# Altium PCB SuperCap-NEW_V2.1.2.PcbDoc (part 1 of 2)
Units mm, origin at the board's own origin, x right, y up, seen from the top; angles counter-clockwise.
Board outline 100.01 x 70.01 mm, 4 copper layers (Top Layer, POWER, GND, Bottom Layer), stack 0.603 mm thick; 121 components, 72 nets, 389 pads, 530 vias.
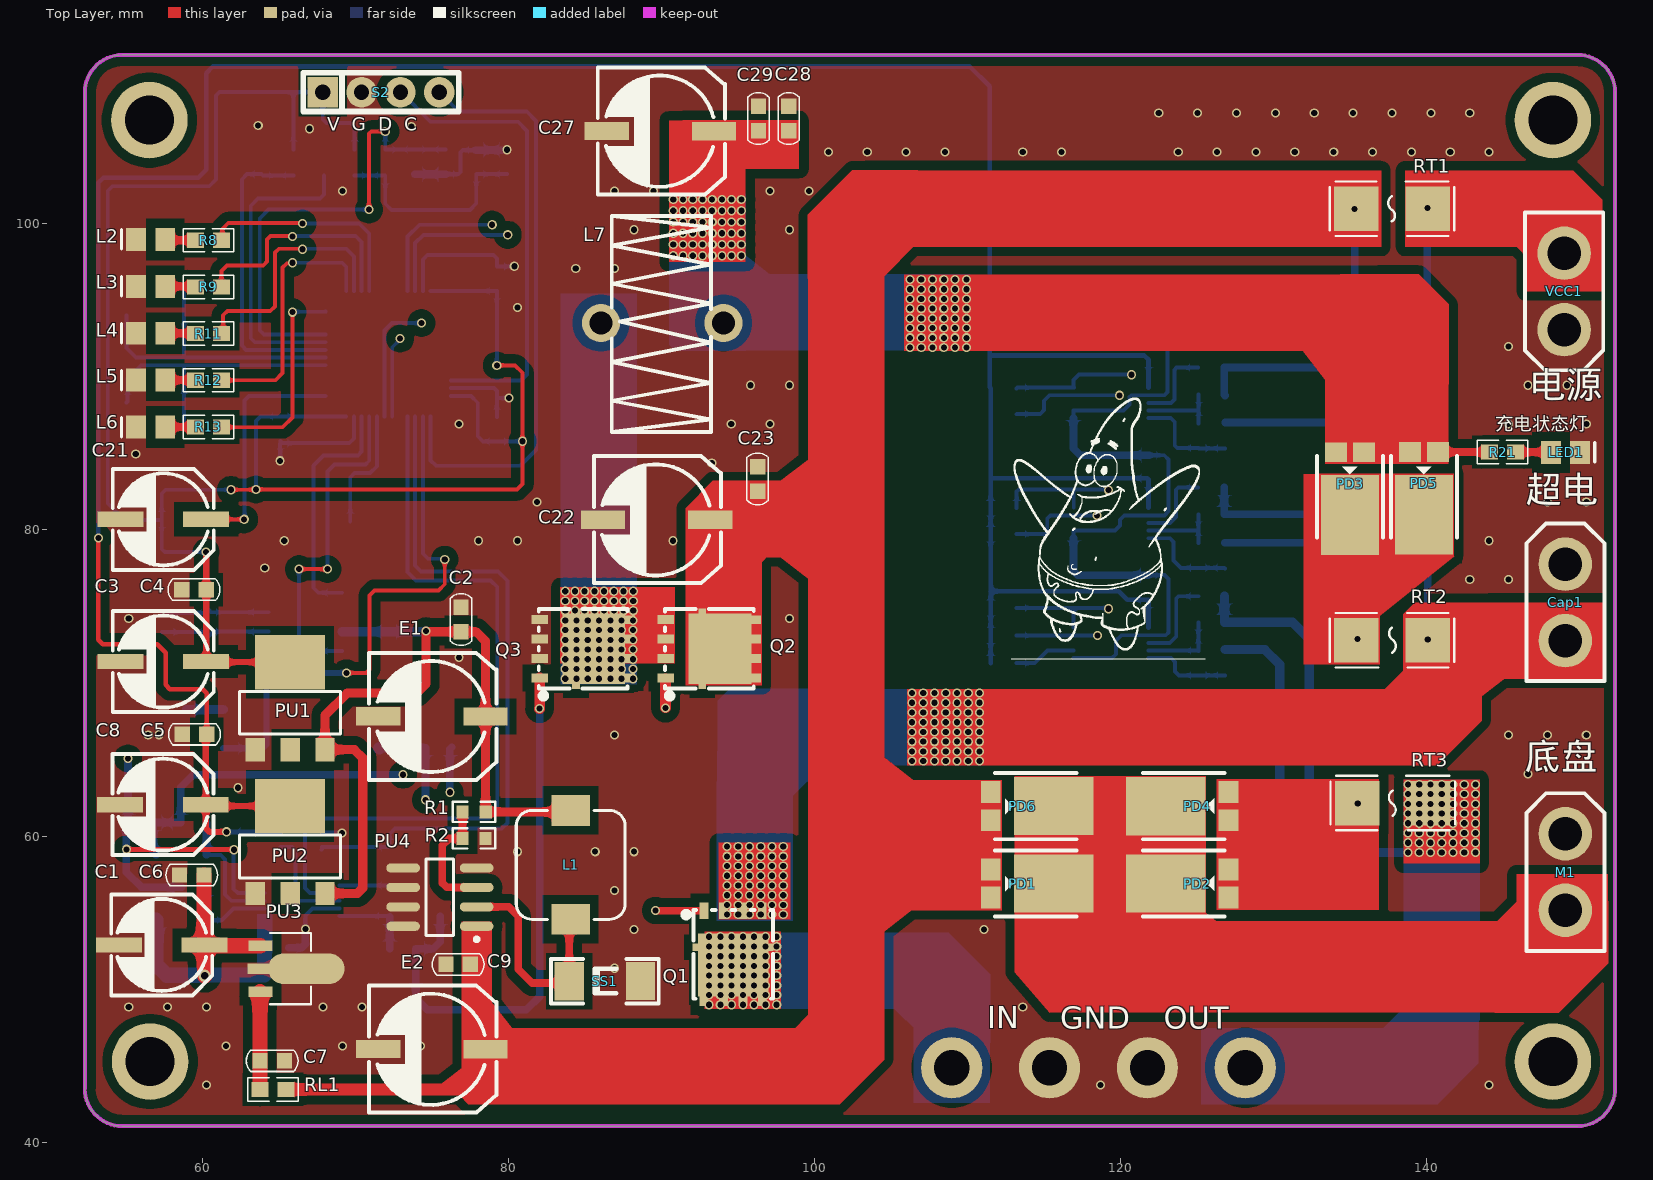
[diagram p0: Top Layer view]
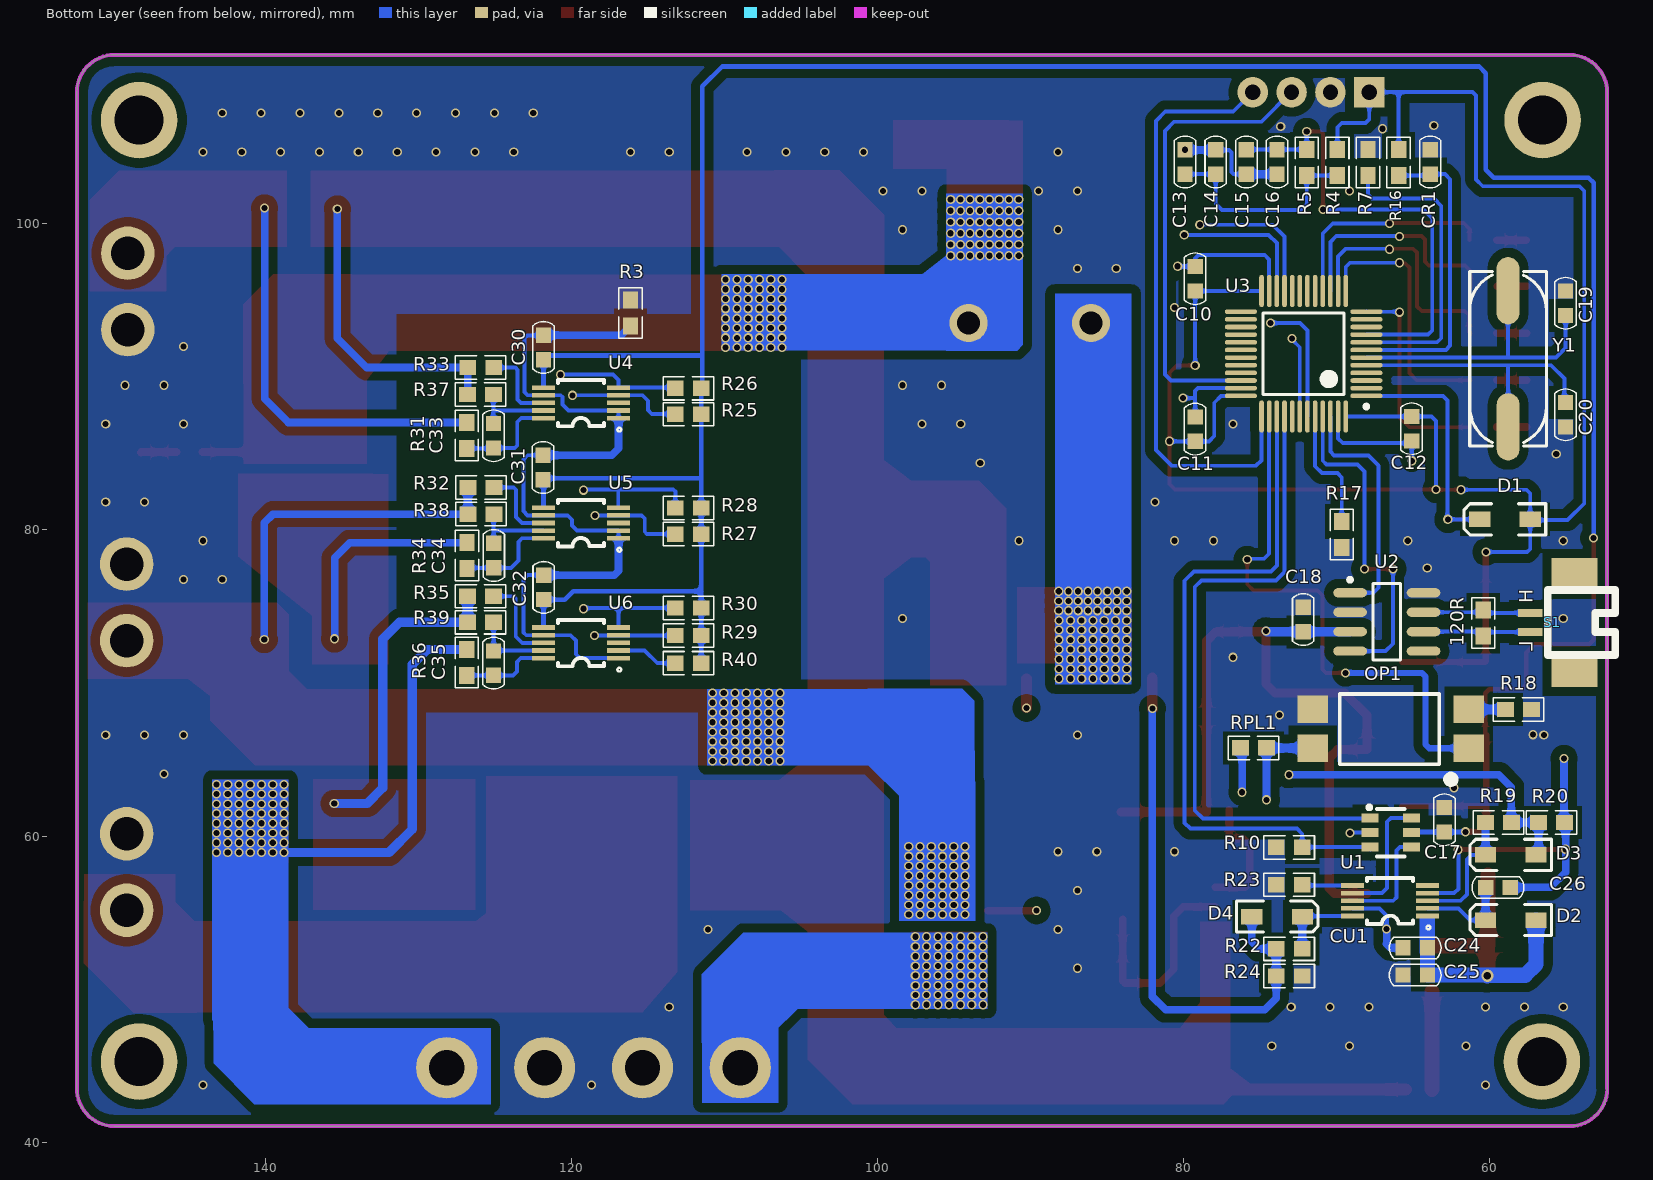
[diagram p1: Bottom Layer view, seen from below]
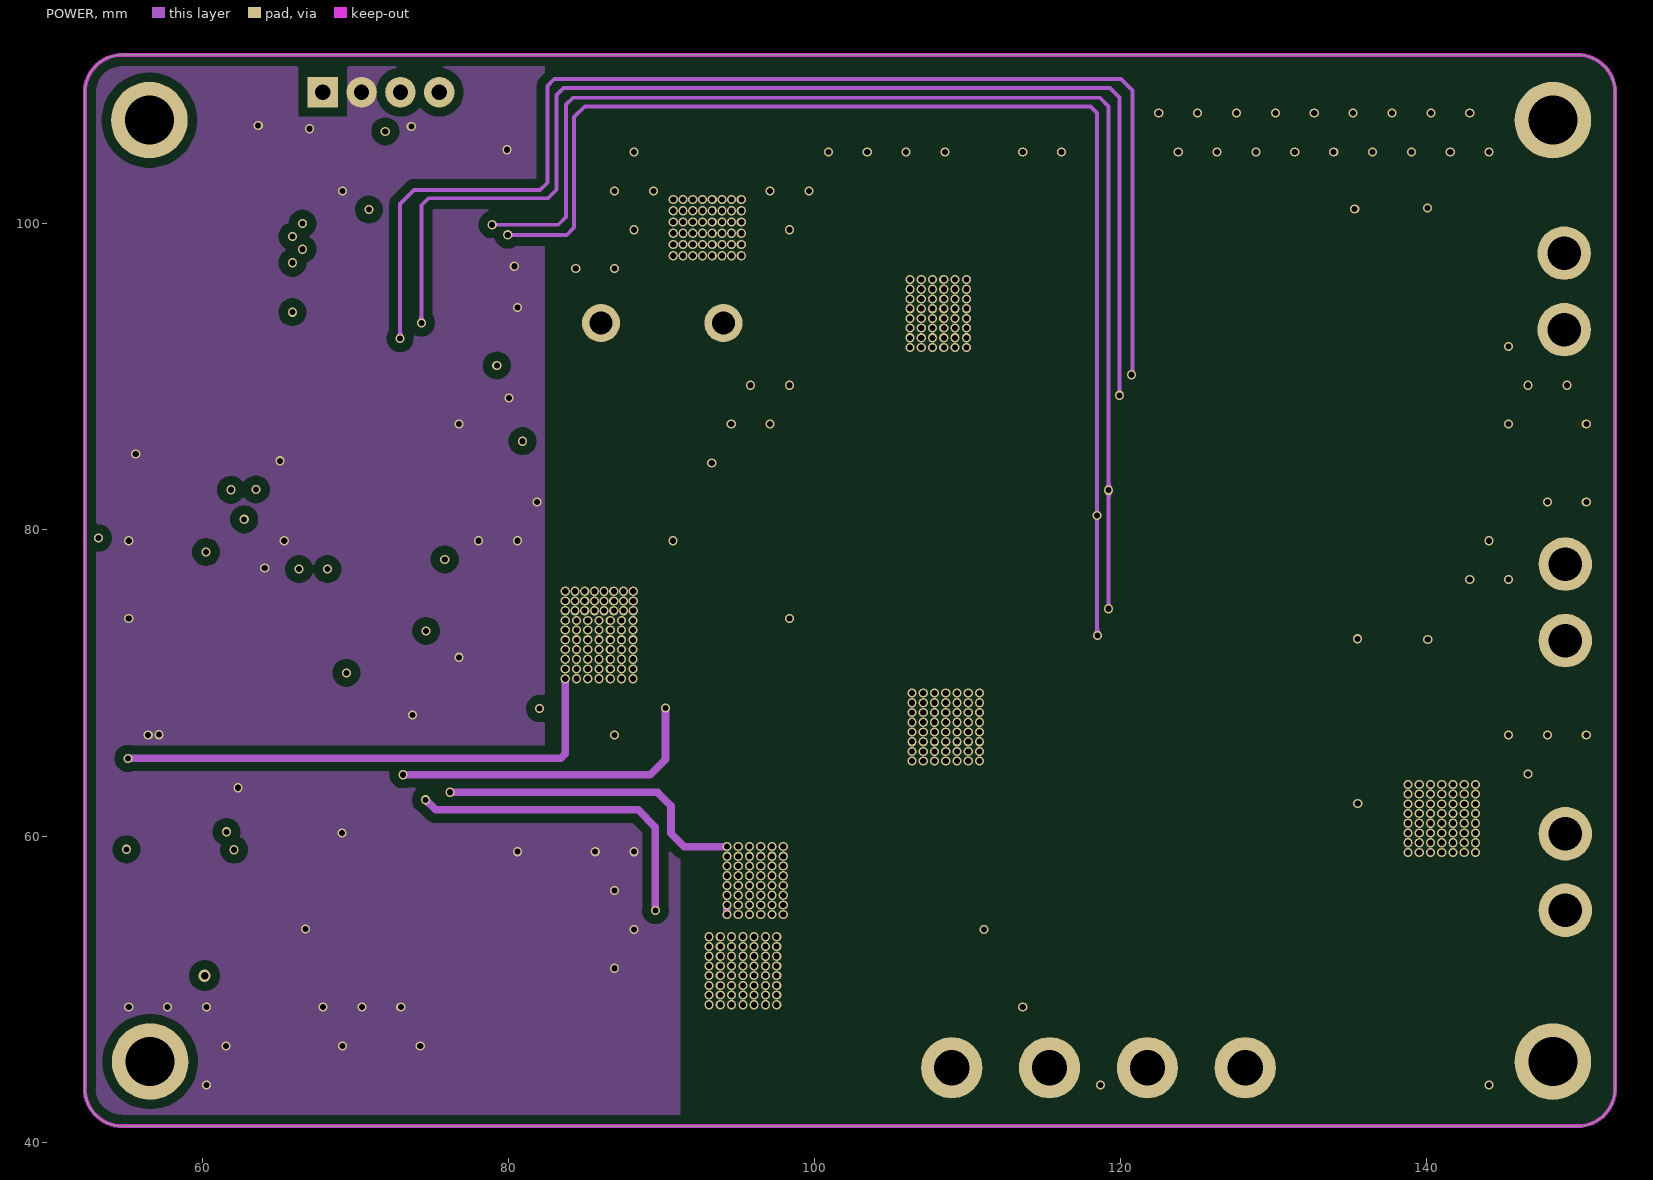
[diagram p2: POWER]
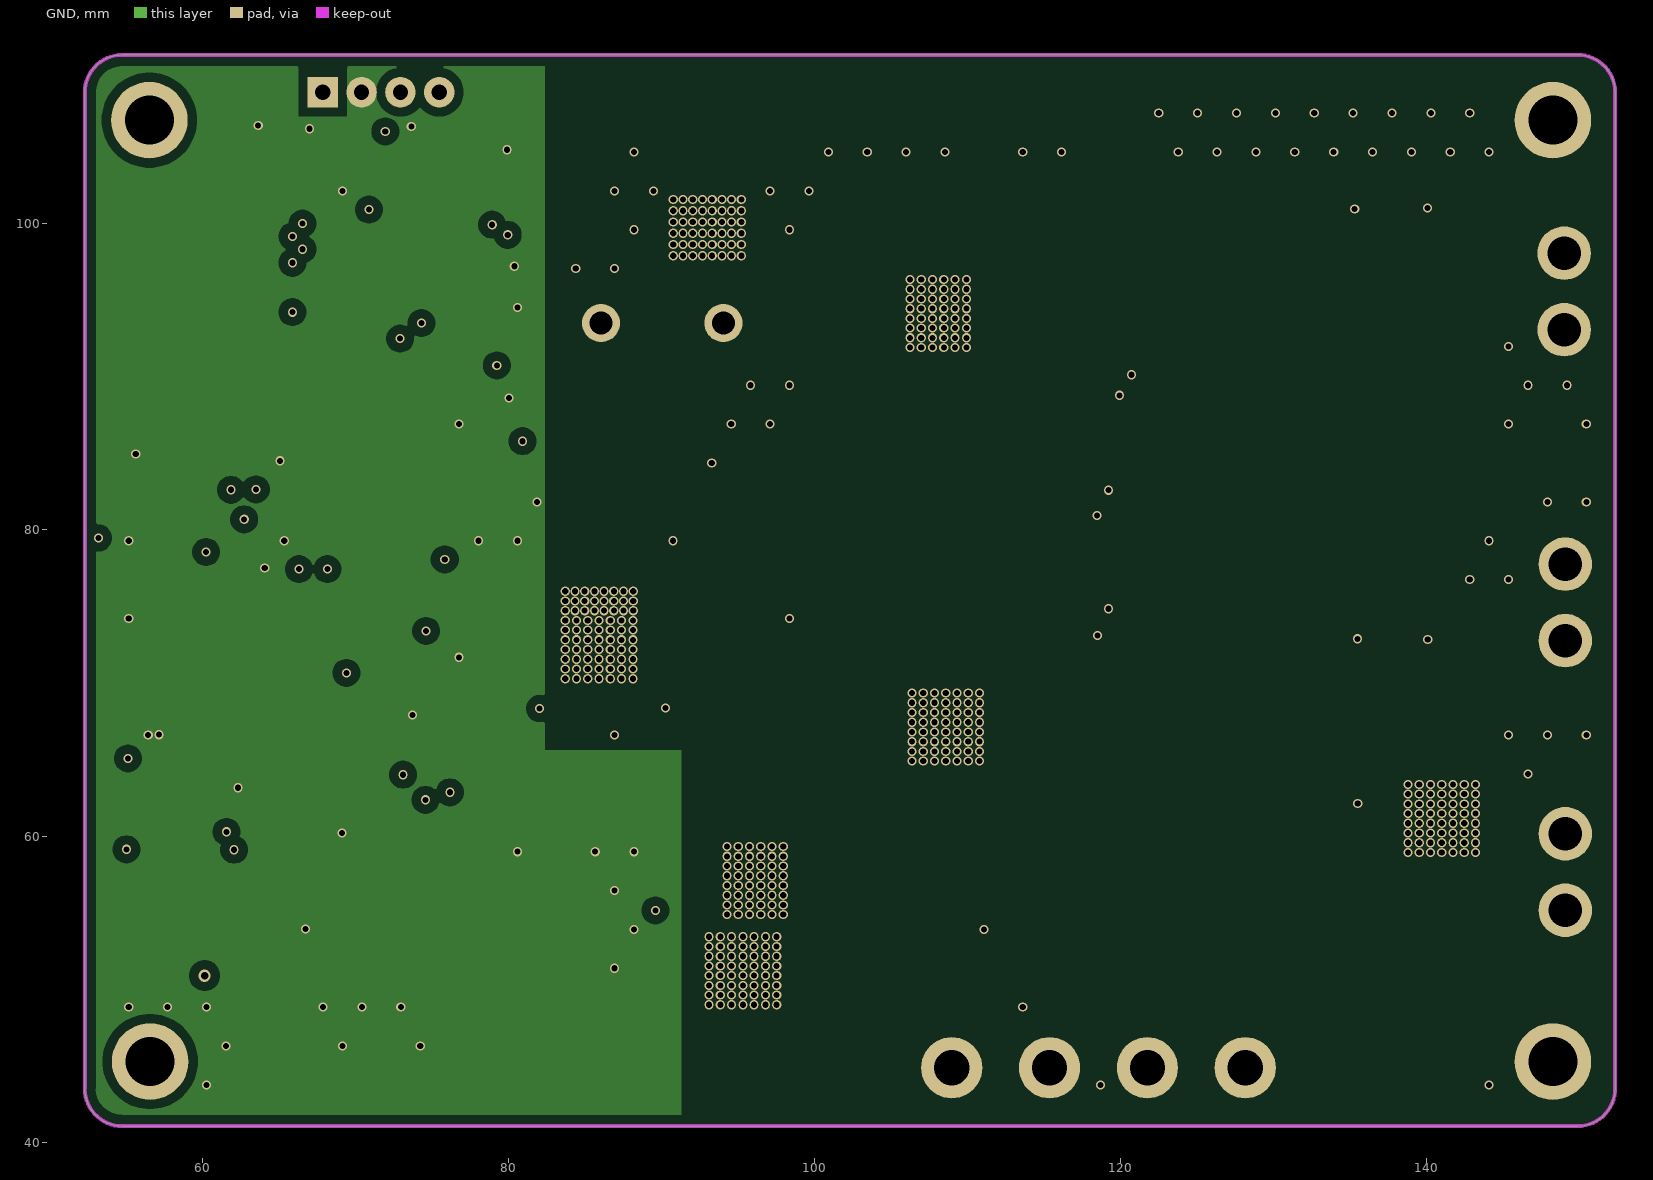
[diagram p3: GND]

## Layer stack, top to bottom
Top Solder: solder mask 0.0102, Solder Resist, Dk 3.5
Top Layer: signal copper 0.0356
Dielectric 2: prepreg 0.0711, PP-006, Dk 4.1
POWER: signal copper 0.035
Dielectric 1: dielectric 0.32, FR-4, Dk 4.8
GND: signal copper 0.035
Dielectric 3: prepreg 0.0711, PP-006, Dk 4.1
Bottom Layer: signal copper 0.0356
Bottom Solder: solder mask 0.0102, Solder Resist, Dk 3.5

## Board outline
52.32,43.483 ccw(c54.771,43.496) 54.784,41.045 54.764,41.045 149.884,41.045 149.886,41.041 ccw(c149.873,43.492) 152.324,43.505 152.324,43.485 152.324,108.636 152.328,108.609 ccw(c149.877,108.596) 149.864,111.047 149.912,111.047 54.812,111.047 54.762,111.049 ccw(c54.775,108.598) 52.324,108.585 52.324,108.56

## Design rules (kind name [scope] priority, off if disabled: settings)
Clearance [All] p1: gap=0.2 ignorepadtopadclearanceinfootprint=FALSE
PolygonConnect [All] p1: connectstyle=Direct reliefconductorwidth=0.254 reliefentries=4 polygonreliefangle="90 Angle" airgapwidth=0.254
RoutingVias [All] p1: holewidth=0.711 width=1.27 viastyle="Through Hole" minholewidth=0.711 minwidth=1.27 maxholewidth=0.711 maxwidth=1.27
SolderMaskExpansion [All] p1: expansion=0.102 istentingtop=FALSE
Width [All] p1: maxlimit=999 minlimit=0.254 preferedwidth=0.254 minimp=50.000000 maximp=50.000000 favimp=50.000000
30 further rules are at their usual default settings.

## Components (designator, comment, footprint, x,y, rotation, side; value= is the part's Value field where it differs from the comment)
120R "Res2" 0603-1 60.427,73.914 r270 bottom value=120R
C1 "47uF/50V" CAP-SMD_BD6.3-L6.6-W6.6-FD 57.353,52.883 r180 top value=100uF
C2 "100nF" 0603C 76.911,74.143 r90 top
C3 "10V/470uF" CAP-SMD_BD6.3-L6.6-W6.6-FD 57.455,71.399 r180 top value=100uF
C4 "100nF" 0603C 59.461,76.098 r0 top
C5 "100nF" 0603C 59.487,66.65 r0 top
C6 "100nF" 0603C 59.309,57.455 r0 top
C7 "104" 0603C 64.567,45.314 r0 top
C8 "Cap Pol1" CAP-SMD_BD6.3-L6.6-W6.6-FD 57.429,62.052 r180 top value=470uF/10V
C9 "104" 0603C 76.721,51.613 r180 top
C10 "100nF" 0603C 79.248,96.418 r270 bottom
C11 "100nF" 0603C 79.248,86.589 r270 bottom
C12 "100nF" 0603C 65.1,86.614 r90 bottom
C13 "1uF" 0603C 79.908,104.051 r90 bottom value=100nF
C14 "100nF" 0603C 77.905,104.051 r270 bottom
C15 "1uF" 0603C 75.902,104.051 r90 bottom value=100nF
C16 "100nF" 0603C 73.9,104.051 r90 bottom
C17 "Cap" 0603C 62.967,61.062 r90 bottom value=100pF
C18 "104" 0603C 72.187,74.143 r90 bottom
C19 "20P" 0603C 55.042,94.818 r90 bottom
C20 "20P" 0603C 55.042,87.528 r270 bottom
C21 "470uF/10V" CAP-SMD_BD6.3-L6.6-W6.6-FD 57.455,80.696 r180 top value=10uF
C22 "47uF/50V" CAP-SMD_BD8.0-L8.3-W8.3-FD 89.687,80.67 r180 top value=100uF
C23 "50V 10uf" 0603C 96.291,83.337 r270 top value=100nF
C24 "25V 10uf" 0603C 64.872,52.691 r180 bottom value=100nF
C25 "100nF" 0603C 64.872,50.913 r180 bottom
C26 "100nF" 0603C 59.461,56.642 r0 bottom
C27 "47uF/50V" CAP-SMD_BD8.0-L8.3-W8.3-FD 89.941,106.07 r180 top value=100uF
C28 "50V 10uf" 0603C 98.323,106.883 r270 top value=100nF
C29 "50V 10uf" 0603C 96.342,106.883 r270 top value=100nF
C30 "100nF" 0603C 121.837,91.933 r270 bottom
C31 "100nF" 0603C 121.862,84.085 r270 bottom
C32 "100nF" 0603C 121.818,76.251 r270 bottom
C33 "100nF" 0603C 125.095,86.157 r270 bottom
C34 "100nF" 0603C 125.081,78.326 r270 bottom
C35 "100nF" 0603C 125.095,71.298 r270 bottom
Cap1 "XT30" XT30 149.073,72.771 r90 top
CR1 "100nF" 0603C 63.887,104.051 r270 bottom
CU1 "LM5106" MSOP_10 64.097,54.754 r90 bottom
D1 "14007" SOD123 57.353,80.696 r0 bottom
D2 "MBR0540TIG" SOD123 56.972,54.508 r0 bottom
D3 "IN4148WS" SOD123 56.972,58.776 r0 bottom
D4 "IN4148WS" SOD123 75.54,54.737 r180 bottom
E1 "Cap Pol1" CAP-SMD_BD8.0-L8.3-W8.3-FD 75.006,67.818 r180 top value=470uF/16V
E2 "Cap Pol1" CAP-SMD_BD8.0-L8.3-W8.3-FD 75.006,46.076 r180 top
L1 "Inductor" "L 6*6" 84.074,54.559 r90 top value=10mH
L2 "红" LED_0805 57.577,98.984 r180 top
L3 "橙" LED_0805 57.577,95.92 r180 top
L4 "绿" LED_0805 57.577,92.856 r180 top
L5 "蓝" LED_0805 57.577,89.792 r180 top
L6 "白" LED_0805 57.577,86.728 r180 top
L7 "68UH" IND-TH_L14.0-W6.5-P8.00-D0.6 86.056,93.523 r0 top
LED1 "绿色" LED_0805 148.138,85.065 r0 top
M1 "XT30" XT30 149.073,55.147 r90 top
OP1 "SuperCap_OUT" SOP-4_L6.5-W4.6-P2.54-LS10.2-TL 66.472,67.005 r0 bottom
PD1 "SB20100" TO-277_3P-L5.4-W4.0-LS6.5-TR 113.585,56.897 r180 top
PD2 "SB20100" TO-277_3P-L5.4-W4.0-LS6.5-TR 125.015,56.895 r0 top
PD3 "SB20100" TO-277_3P-L5.4-W4.0-LS6.5-TR 135.001,83.033 r90 top
PD4 "SB20100" TO-277_3P-L5.4-W4.0-LS6.5-TR 125.015,61.95 r0 top
PD5 "SB20100" TO-277_3P-L5.4-W4.0-LS6.5-TR 139.834,83.038 r90 top
PD6 "SB20100" TO-277_3P-L5.4-W4.0-LS6.5-TR 113.585,61.951 r180 top
PU1 "AMS1117-3.3" SOT-223 65.735,68.504 r90 top
PU2 "AMS1117-3.3" SOT-223 65.735,59.106 r90 top
PU3 "78L05" SOT-89-3_L4.5-W2.5-P1.50-LS4.2-BR 65.151,51.333 r180 top
PU4 "XL1509-ADJ/5V0" "SOP8 N" 75.527,56.007 r180 top
Q1 "HYG210P06LQ1C2" MOS_PQFN 92.786,55.067 r0 top
Q2 "BSC109N10NS3" PDFN-8_L4.9-W5.8-P1.27-LS6.1-BL_2 90.338,70.333 r90 top
Q3 "BSC109N10NS3" PDFN-8_L4.9-W5.8-P1.27-LS6.1-BL_2 82.093,70.333 r90 top
R1 "Res1" R0603 77.064,61.493 r0 top value=3.3K
R2 "Res1" R0603 78.457,59.927 r180 top value=1K
R3 "Res2" 0603-1 116.154,94.183 r90 bottom value=0R
R4 "0R" 0603-1 69.957,104.012 r270 bottom value=1K
R5 "47R" 0603-1 71.959,104.012 r90 bottom value=1K
R7 "0R" 0603-1 67.954,104.012 r90 bottom value=1K
R8 "Res2" 0603-1 60.401,98.933 r180 top value=1K
R9 "Res2" 0603-1 60.401,95.883 r0 top value=1K
R10 "Res2" 0603-1 73.101,59.258 r0 bottom value=10K
R11 "Res2" 0603-1 60.401,92.834 r0 top value=1K
R12 "Res2" 0603-1 60.401,89.784 r0 top value=1K
R13 "Res2" 0603-1 60.401,86.735 r0 top value=1K
R16 "10K" 0603-1 65.952,104.012 r270 bottom
R17 "10K" 0603-1 69.672,79.705 r270 bottom
R18 "1K" 0603-1 58.115,68.275 r180 bottom
R19 "10Ω" 0603-1 59.436,60.884 r180 bottom value=1K
R20 "10K" 0603-1 55.956,60.884 r180 bottom value=1K
R21 "10K" 0603-1 144.971,85.09 r180 top value=1K
R22 "10Ω" 0603-1 73.101,52.629 r0 bottom value=1K
R23 "47K" 0603-1 73.101,56.82 r0 bottom value=1K
R24 "10K" 0603-1 73.101,50.851 r180 bottom value=1K
R25 "4.7K" 0603-1 112.37,87.561 r0 bottom value=1K
R26 "4.7K" 0603-1 112.37,89.256 r0 bottom value=1K
R27 "4.7K" 0603-1 112.37,79.731 r0 bottom value=1K
R28 "4.7K" 0603-1 112.37,81.432 r0 bottom value=1K
R29 "4.7K" 0603-1 112.37,73.101 r0 bottom value=1K
R30 "4.7K" 0603-1 112.37,74.905 r0 bottom value=1K
R31 "5.1Ω" 0603-1 126.848,86.182 r90 bottom value=1K
R32 "Res2" 0603-1 125.927,82.779 r180 bottom value=10R
R33 "Res2" 0603-1 125.937,90.613 r180 bottom value=10R
R34 "5.1Ω" 0603-1 126.826,78.326 r90 bottom value=1K
R35 "Res2" 0603-1 125.945,75.667 r180 bottom value=10R
R36 "5.1Ω" 0603-1 126.848,71.335 r90 bottom value=1K
R37 "5.1Ω" 0603-1 125.959,88.849 r0 bottom value=1K
R38 "5.1Ω" 0603-1 125.927,81.037 r0 bottom value=1K
R39 "5.1Ω" 0603-1 125.945,73.965 r0 bottom value=1K
R40 "Res2" 0603-1 112.37,71.298 r180 bottom value=4.7K
RL1 "47R" 0603-1 64.618,43.434 r180 top value=1K
RPL1 "1K" 0603-1 75.438,65.761 r180 bottom
RT1 "2512 5mΩ 2W" "FUSE-SMD_L6.1-W2.7 - duplicate" 137.744,100.99 r180 top value=1K
RT2 "2512 5mΩ 2W" "FUSE-SMD_L6.1-W2.7 - duplicate" 137.744,72.796 r0 top value=1K
RT3 "2512 5mΩ 2W" "FUSE-SMD_L6.1-W2.7 - duplicate" 137.795,62.154 r180 top value=1K
S1 "CAN通信" 1.25_2Pin 57.353,74.58 r270 bottom
S2 "程序下载" S-4 67.869,108.61 r90 top
SS1 "D Schottky" 贴片M7 86.004,50.419 r270 top
U1 "SN74LVC2G17" SOT-23-6_L2.9-W1.6-P0.95-LS2.8-BR 66.472,60.274 r0 bottom
U2 "TJA1050" "SOP8 N" 66.726,73.99 r180 bottom
U3 "STM32F103C8T6" LQFP-48_M 72.161,91.516 r0 bottom
U4 "INA226" MSOP_10 116.967,87.289 r90 bottom
U5 "INA226" MSOP_10 116.967,79.441 r90 bottom
U6 "INA226" MSOP_10 116.967,71.607 r90 bottom
VCC1 "XT30" XT30 148.996,98.091 r270 top
Y1 "8MHz" X-SM49 58.801,91.186 r90 bottom

## Footprints (in the part's own frame and the unit in brackets; to place one, negate y for a bottom-side part, rotate by r counter-clockwise, add the part's x,y. Pads: shape width x height; smd on the part's side, far side on the other; paste and mask are expansions set on the pad)
1.25_2Pin [mm]
  rect 2.1x3 smd: 0(-2.55,2.9) 0(3.8,2.9)
  rect 0.5x1.6 smd: 1(0,0) 2(1.25,0)
  silkscreen extent -1.5,1.15 2.75,5.55
0603-1 [mm]
  rect 1.1x1 smd: 1(-0.85,0) 2(0.85,0)
  silkscreen extent -1.65,-0.76 1.65,0.76, body extent -1.14,-0.38 1.14,0.38, height 1
0603C [mm]
  rect 1x1 smd: 1(0.8,0) 2(-0.8,0)
  silkscreen extent -1.69,-0.7 1.69,0.7
CAP-SMD_BD6.3-L6.6-W6.6-FD [mm]
  rect 3x1 smd: 1(-2.8,0) 2(2.8,0)
  silkscreen extent -3.3,-3.3 3.3,3.3
CAP-SMD_BD8.0-L8.3-W8.3-FD [mm]
  rect 2.901x1.199 smd: 1(-3.5,0.005) 2(3.5,-0.005)
  silkscreen extent -4.21,-4.16 4.1,4.15
"FUSE-SMD_L6.1-W2.7 - duplicate" [mm]
  rect 2.91x2.905 smd: 1(-2.33,0) 2(2.33,0)
  silkscreen extent -4.06,-1.78 4.06,1.78
IND-TH_L14.0-W6.5-P8.00-D0.6 [mm]
  round 2.5 hole 1.5: 1(0,0) 2(8,0)
  silkscreen extent 0.7,-7.11 7.17,6.98
"L 6*6" [mm]
  rect 2x2.5 smd: 1(0,0) 2(7.112,0)
  silkscreen extent 0,-3.56 7.11,3.56, body extent 0,-3.56 7.11,3.56, height 4
LED_0805 [mm]
  rect 1.3x1.5 smd: 1(0,0) 2(1.9,0)
  silkscreen extent 2.86,-0.63 2.86,0.64
LQFP-48_M [mm]
  oval 2.1x0.3 smd: 1(-4.1,2.75) 2(-4.1,2.25) 3(-4.1,1.75) 4(-4.1,1.25) 5(-4.1,0.75) 6(-4.1,0.25) 7(-4.1,-0.25) 8(-4.1,-0.75) 9(-4.1,-1.25) 10(-4.1,-1.75) 11(-4.1,-2.25) 12(-4.1,-2.75) 25(4.1,-2.75) 26(4.1,-2.25) 27(4.1,-1.75) 28(4.1,-1.25) 29(4.1,-0.75) 30(4.1,-0.25) 31(4.1,0.25) 32(4.1,0.75) 33(4.1,1.25) 34(4.1,1.75) 35(4.1,2.25) 36(4.1,2.75)
  oval 0.3x2.1 smd: 13(-2.75,-4.1) 14(-2.25,-4.1) 15(-1.75,-4.1) 16(-1.25,-4.1) 17(-0.75,-4.1) 18(-0.25,-4.1) 19(0.25,-4.1) 20(0.75,-4.1) 21(1.25,-4.1) 22(1.75,-4.1) 23(2.25,-4.1) 24(2.75,-4.1) 37(2.75,4.1) 38(2.25,4.1) 39(1.75,4.1) 40(1.25,4.1) 41(0.75,4.1) 42(0.25,4.1) 43(-0.25,4.1) 44(-0.75,4.1) 45(-1.25,4.1) 46(-1.75,4.1) 47(-2.25,4.1) 48(-2.75,4.1)
  silkscreen extent -4.22,-2.65 2.65,3.57, body extent -3.5,-3.5 3.5,3.5, height 1.6
MOS_PQFN [mm]
  rect 0.58x1.079 smd: 1(0,0.041) 1(3.81,0.041) 3(1.27,0.041) 3(2.54,0.041)
  rect 0.95x0.5 smd: 2(-0.264,-2.329) 2(4.074,-2.329)
  rect 0.58x1.08 smd: 2(0.005,-5.629) 2(1.275,-5.629) 2(2.545,-5.629) 2(3.805,-5.629)
  rect 4.6x4.1 smd: 2(1.905,-3.489)
  silkscreen extent -1.29,-5.7 4.5,0.1
MSOP_10 [mil]
  rect 12x59.06 smd: 1(0.63,-1.5) 2(20.32,-1.5) 3(40,-1.5) 4(59.69,-1.5) 5(79.37,-1.5) 6(79.37,191.5) 7(59.69,191.5) 8(40,191.5) 9(20.32,191.5) 10(0.63,191.5)
  silkscreen extent -34,-8 99,154
PDFN-8_L4.9-W5.8-P1.27-LS6.1-BL_2 [mm]
  rect 0.58x1.079 smd: 1(3.81,0.041) 3(0,0.041) 3(1.27,0.041) 3(2.54,0.041)
  rect 0.95x0.5 smd: 2(-0.264,-2.329) 2(4.074,-2.329)
  rect 0.58x1.08 smd: 2(0.005,-5.629) 2(1.275,-5.629) 2(2.545,-5.629) 2(3.805,-5.629)
  rect 4.6x4.1 smd: 2(1.905,-3.489)
  silkscreen extent -1.29,-5.7 4.5,0.1
R0603 [mm]
  rect 0.806x0.864 smd: 1(-0.055,0.085) 2(1.452,0.085)
  silkscreen extent -0.69,-0.58 2.08,0.75
S-4 [mm]
  rect 2x2 hole 1: 1(0,0)
  round 2 hole 1: 2(0,-2.54) 3(0,-5.08) 4(0,-7.62)
  silkscreen extent -1.27,-8.89 1.27,1.27
SOD123 [mil]
  rect 55x40 smd: 1(0,0) 2(130,0)
  silkscreen extent -40,-40 170,40
"SOP8 N" [mm]
  oval 2.2x0.6 smd: 1(-2.4,1.905) 2(-2.4,0.635) 3(-2.4,-0.635) 4(-2.4,-1.905) 5(2.4,-1.905) 6(2.4,-0.635) 7(2.4,0.635) 8(2.4,1.905)
  silkscreen extent -2.53,-2.5 0.9,2.88, body extent -1.95,-2.45 1.95,2.45, height 1.75
SOP-4_L6.5-W4.6-P2.54-LS10.2-TL [mm]
  rect 2x1.8 smd: 1(-5.1,1.27) 2(-5.1,-1.27) 3(5.1,-1.27) 4(5.1,1.27)
  silkscreen extent -4.42,-2.29 3.32,3.79
SOT-23-6_L2.9-W1.6-P0.95-LS2.8-BR [mm]
  rect 1.1x0.6 smd: 1(1.35,-0.899) 2(1.35,0.051) 3(1.35,1.001) 4(-1.35,1.001) 5(-1.35,0.051) 6(-1.35,-0.899)
  silkscreen extent -0.9,-1.73 1.52,1.6
SOT-89-3_L4.5-W2.5-P1.50-LS4.2-BR [mm]
  rect 1.575x0.672 smd: 1(1.356,-1.5) 2(1.397,0) 3(1.356,1.5)
  oval 5x2 smd: 2(-1.651,0)
  silkscreen extent -1.95,-2.33 0.7,2.33
SOT-223 [mil]
  rect 60x50 smd: 1(-112.5,90) 3(-112.5,-90) ""(-112.5,0)
  rect 140x180 smd: 2(112.5,0)
  silkscreen extent -73,-130 38,130
TO-277_3P-L5.4-W4.0-LS6.5-TR [mm]
  rect 1.29x1.422 smd: 1(2.054,-0.92) 1(2.054,0.92)
  rect 5.2x3.8 smd: 2(-2.054,0)
  silkscreen extent -3.54,-2.16 1.8,2.16
X-SM49 [mm]
  oval 4.4x1.5 smd: 1(4.45,0.004) 2(-4.45,-0.004)
  silkscreen extent -5.7,-2.5 5.72,2.5
XT30 [mm]
  round 3.5 hole 2.2: 1(0,0) 2(5,0)
  silkscreen extent -2.65,-2.55 7.65,2.55
贴片M7 [mm]
  rect 2.5x1.9 smd: 1(-0.1,2.625) 2(-0.091,-2.025)
  silkscreen extent -1.55,-3.22 1.36,3.82

## Part data
120R R1 R2 R3 R8 R9 R10 R11 R12 R13 R32 R33 R35 R40: "Resistor", LatestRevisionDate=17-Jul-2002, LatestRevisionNote="Re-released for DXP Platform.", Published=8-Jun-2000, Publisher="Altium Limited"
  120R R3 R8 R9 R10 R11 R12 R13 R32 R33 R35 R40: PackageDescription="Axial Device, Thru-Hole; 2 Leads; 0.4 in Pin Spacing", PackageReference=AXIAL-0.4
  R1 R2: PackageDescription="Axial Device, Thru-Hole; 2 Leads; 0.3 in Pin Spacing", PackageReference=AXIAL-0.3
C1 C3 C22 C27: library part "Cap Pol", "极性电解电容", LatestRevisionDate=17-Jul-2002, LatestRevisionNote="Re-released for DXP Platform.", PackageReference=RB7.6-15, Published=8-Jun-2000, Publisher="Altium Limited", Vol=16V
C2 C7 C9: library part C
C4 C5 C6 C10 C11 C12 C13 C14 C15 C16 C23 C24 C25 C26 C28 C29 C30 C31 C32 C33 C34 C35: library part Cap, "无极性电容", LatestRevisionDate=17-Jul-2002, LatestRevisionNote="Re-released for DXP Platform.", PackageReference=RAD-0.3, Published=8-Jun-2000, Publisher="Altium Limited"
C8 E1 E2: "Polarized Capacitor (Radial)", LatestRevisionDate=17-Jul-2002, LatestRevisionNote="Re-released for DXP Platform.", PackageDescription="Polarized Capacitor (Radial); 2 Leads", PackageReference=RB7.6-15, Published=8-Jun-2000, Publisher="Altium Limited"
  E2: H781F=47uF/50V
C17: "Capacitor", LatestRevisionDate=17-Jul-2002, LatestRevisionNote="Re-released for DXP Platform.", PackageDescription="Radial Cap, Thru-Hole; 2 Leads; 0.3 in Pin Spacing", PackageReference=RAD-0.3, Published=8-Jun-2000, Publisher="Altium Limited"
C18 C19 C20 CR1: library part CAP-1
C21: library part "Cap Pol1", "Polarized Capacitor (Radial)", Published=8-Jun-2000, Publisher="Altium Limited", Revision="July-2002: Re-released for DXP Platform."
Cap1 M1 VCC1: library part JP-2
CU1 U4 U5 U6: library part Component_1
D1 D4 PD1 PD2 PD3 PD4 PD5 PD6: library part "Diode 1N914", "High Conductance Fast Diode", Code_JEDEC=DO-204-AH, ComponentLink1Description="Manufacturer Link", ComponentLink1URL=http://www.fairchildsemi.com/, ComponentLink2Description=Datasheet, ComponentLink2URL=http://www.fairchildsemi.com/ds/1N%2F1N4448.pdf, DatasheetVersion=1997, LatestRevisionDate=17-Jul-2002, LatestRevisionNote="Re-released for DXP Platform.", PackageDescription="Diode, Axial; Body 3.8 x 1.9 mm (LxDia. max), Lead Dia. 0.53 mm (max)", PackageReference=DO-35, Published=8-Jun-2000, Publisher="Altium Limited"
D2 D3: library part D-1
L2 L3 L4 L5 L6 LED1: library part LED0, "发光二极管", LatestRevisionDate=08-Jul-2005, LatestRevisionNote="Mech Layer 1 removed.", PackageReference=LED-0, Published=8-Jun-2000, Publisher="Altium Limited"
L7: library part Inductance
OP1: library part Optoisolator1, "4-Pin Phototransistor Optocoupler", DatasheetVersion=Nov-2003, LatestRevisionDate=04-Mar-2005, LatestRevisionNote="Sch pins 3 & 4 Swapped.", PackageReference=DIP-4, Published=24-Mar-1999, Publisher="Altium Limited"
PU1 PU2: library part LD1117
PU4: library part XL1509-ADJ
Q1: library part PMOS-2, "P-Channel Power MOSFET", ComponentLink1Description="Manufacturer Link", ComponentLink1URL=http://www.irf.com/, DatasheetVersion=PD-9.390D, LatestRevisionDate=17-Jul-2002, LatestRevisionNote="Re-released for DXP Platform.", Note="Pin 4 not drawn and electrically connected to Pin 2.", PackageDescription="TO, Thru-Hole, Vertical, Heatsink Mounted; 3 In-Line Leads; Pitch 2.54 mm", PackageReference=TO-220AB, PackageVersion=Feb-1997, Published=8-Jun-2000, Publisher="Altium Limited"
Q2 Q3: library part NMOS-2, "N-Channel Power MOSFET", ComponentLink1Description="Manufacturer Link", ComponentLink1URL=http://www.irf.com/, DatasheetVersion=PD-9.814, LatestRevisionDate=17-Jul-2002, LatestRevisionNote="Re-released for DXP Platform.", Note="Pin 2 is electrically connected to pin 4.", PackageDescription="TO, Thru-Hole, Vertical, Heatsink Mounted; 3 In-Line Leads; Pitch 2.54 mm", PackageReference=TO-220AB, PackageVersion=Feb-1997, Published=8-Jun-2000, Publisher="Altium Limited"
R4 R5 R7 R18 R19 R20 R21 R22 R23 R24 R25 R26 R27 R28 R29 R30 R31 R34 R36 R37 R38 R39 RL1 RPL1 RT1 RT2 RT3: library part Res1, "贴片电阻", LatestRevisionDate=17-Jul-2002, LatestRevisionNote="Re-released for DXP Platform.", PackageReference=AXIAL-0.4, Published=8-Jun-2000, Publisher="Altium Limited"
R16 R17: library part R
S1: library part S-2
S2: library part S-4
SS1: "Schottky Diode", Code_JEDEC=DO-214-AA, LatestRevisionDate=17-Jul-2002, LatestRevisionNote="Re-released for DXP Platform.", PackageDescription="DO-214-AA/SMB; 2 C-Bend Leads; Body 5.3 x 3.6 mm, inc. leads (LxW)", PackageReference=SMB, Published=8-Jun-2000, Publisher="Altium Limited"
U2: library part 24C02
Y1: library part XTAL, "Crystal Oscillator", LatestRevisionDate=17-Jul-2002, LatestRevisionNote="Re-released for DXP Platform.", Published=8-Jun-2000, Publisher="Altium Limited"
L1: Code_IEC=1005, Code_JEITA=0402, LatestRevisionDate=29-May-2009, LatestRevisionNote="IPC-7351 Footprint Added.", PackageDescription="Chip Inductor", PackageReference=0402-A, Published=8-Jun-2000, Publisher="Altium Limited"

## Free pads (board coordinates)
  round 5 hole 3.2: 4(56.54,106.782) 4(56.591,45.263) 4(148.26,45.263) 4(148.26,106.782)
  round 4 hole 2.3: 5(108.974,44.856) 5(115.367,44.856) 5(121.759,44.856) 6(128.151,44.856)

## Via types
v1: diameter 0.6, hole 0.4, Top Layer to Bottom Layer, 529 vias
v2: diameter 0.8, hole 0.5, Top Layer to Bottom Layer, 1 vias

## Nets (pads, with @x,y where several pads share a name; then routed paths per layer and width w, separated by ;. In a path a pad name is that pad's centre, name@x,y a point inside that pad or via, vN(x,y) a via of type N, cw(c..) or ccw(c..) an arc to the next point about the centre after c; other vN are vias at no path point)
3.3V: C5.1 C8.1 C17.2 C30.1 C31.1 C32.1 PU2.2 R25.1 R26.1 R27.1 R28.1 R29.1 R30.1 R40.2 U1.5 U4.6 U5.6 U6.6 | length 199.2
  Top Layer w0.3: v1(53.213,79.477) 53.213,72.822 53.492,72.542 57.048,72.542 57.607,71.984 57.607,69.875 57.887,69.596 60.02,69.596 60.287,69.329 C5.1 C5.1@60.229,66.592 ; C8.1 C8.1@60.318,61.963
  Top Layer w0.4: C5.1@60.229,66.592 C8.1 60.229,60.509 60.464,60.274 v1(61.58,60.274) ; C8.1@60.318,61.963 PU2.2
  Bottom Layer w0.3: v1(53.213,79.477) 53.213,102.692 53.543,103.022 59.741,103.022 60.249,103.53 60.249,109.855 60.681,110.287 110.16,110.287 111.455,108.991 111.455,91.404 ; v1@61.658,60.262 65.084,60.262 U1.5 ; R40.2 R29.1 R30.1 111.52,75.997 ; U6.6 121.831,75.438 C32.1 120.434,75.451 119.888,75.997 111.52,75.997 ; U5.6 121.831,83.316 121.765,83.383 111.52,83.383 ; U4.6 121.831,91.128 C30.1 121.566,91.404 111.455,91.404 ; 111.455,91.404 111.455,89.32 R26.1 R25.1 111.52,83.383 ; 111.52,75.997 111.52,83.383
3.3V_MCU: C3.1 C4.1 C10.1 C11.1 C12.1 D1.1 PU1.2 R4.1 R16.1 S2.1 U3.24 U3.36 U3.48 | length 132.7
  Top Layer w0.254: v1(61.874,82.626) 63.475,82.626 v1(63.5,82.652) 80.569,82.652 80.924,83.007 80.924,90.272 80.442,90.754 v1(79.248,90.754)
  Top Layer w0.4: v1(60.249,78.562) 60.261,78.55 C4.1 60.261,71.406 C3.1 60.293,71.361 PU1.2
  Bottom Layer w0.254: v1(60.249,78.562) 57.556,78.562 57.353,78.765 D1.1 ; v1(61.874,82.626) 57.607,82.626 57.353,82.372 D1.1 ; v1(63.5,82.652) 63.5,87.122 63.792,87.414 C12.1 65.102,87.416 U3.48 ; R16.1 65.952,107.032 65.955,107.036 65.955,108.61 ; R4.1 69.957,106.319 69.672,106.604 68.123,106.604 67.869,106.858 S2.1 65.955,108.61 ; U3.24 79.246,95.616 C10.1 v1(79.248,90.754) ; U3.36 77.553,88.766 78.003,88.316 78.003,86.131 78.346,85.789 C11.1 80.912,85.789 v1(80.924,85.801) ; D1.1 57.302,80.645 54.915,80.645 53.823,81.737 53.823,102.159 54.127,102.464 60.452,102.464 60.884,102.895 60.884,108.382 61.112,108.61 65.955,108.61
5V: C2.2 C18.2 E1.1 L1.2 PU1.3 PU2.3 R1.2 U2.3 | length 53.1
  Top Layer w0.6: PU2.3 70.134,56.248 70.485,56.6 70.485,65.1 69.939,65.646 PU1.3 68.021,67.894 69.469,69.342 74.016,69.342 74.625,69.952 v1(74.625,73.406) ; v1@74.676,73.355 C2.2@76.899,73.355 ; C2.2 77.902,73.343 78.506,72.738 E1.1 78.515,67.804 R1.2@78.515,61.731 ; R1.2 L1.2@84.074,61.578
  Bottom Layer w0.6: U2.3 74.574,73.355 v1(74.625,73.406)
12V: C1.1 C6.1 C24.1 C25.1 CU1.1 D2.1 PU3.1 | length 22.3
  Top Layer w1: C1.1@60.109,52.883 C6.1 ; v2(60.153,50.876) C1.1 60.203,52.833 PU3.1
  Bottom Layer w1: D2.1 56.972,51.613 57.683,50.902 60.128,50.902 v2(60.153,50.876) 60.19,50.913 C25.1 C24.1
AGND: C30.2 C31.2 C32.2 R3.1 U4.1 U4.2 U4.7 U5.1 U5.2 U5.7 U6.1 U6.7 | length 57
  Bottom Layer w0.254: U6.1 119.451,71.623 119.71,71.882 119.71,72.771 120.062,73.123 U6.7 122.957,73.123 123.139,73.304 123.139,76.784 122.873,77.051 C32.2 ; U5.1 U5.2 119.631,79.957 119.964,80.289 119.964,80.67 120.25,80.957 U5.7 122.867,80.957 123.139,81.229 123.139,84.607 122.862,84.885 C31.2 C31.2@121.844,84.903 ; U4.1 U4.2 120.198,87.805 120.599,88.206 120.599,88.697 120.708,88.805 U4.7 122.867,88.805 123.066,89.005 123.066,92.529 122.885,92.71 121.86,92.71 C30.2
  Bottom Layer w0.5: R3.1 116.754,92.733 C30.2 ; U5.1 116.929,77.33 117.208,77.051 C32.2 ; U4.1 116.929,85.331 117.375,84.885 C31.2
B_LED: R12.2 U3.13 | length 17.1
  Top Layer w0.254: R12.2 64.791,89.784 65.253,90.246 65.253,97.155 65.527,97.43 65.858,97.43 v1(65.888,97.46)
  Bottom Layer w0.254: v1(65.888,97.46) 69.139,97.46 69.411,97.187 U3.13
Battery: R31.2 RT1.1 VCC1.1 | length 26.3
  Top Layer w3: VCC1.1@148.986,98.102 VCC1.1
  Bottom Layer w0.508: R31.2 138.518,87.032 140.056,88.57 v1(140.056,101.041)
Battery_out: C9.2 C22.1 C23.1 E2.1 PD1.1 PD6.1 PU4.1 Q2.2 R33.1 R37.2 RL1.1 RT1.2 | length 35
  Top Layer w0.508: 77.267,43.434 78.506,44.674 E2.1
  Top Layer w0.8: RL1.1 77.267,43.434
  Top Layer w3: Q2.2@93.827,72.238 Q2.2@94.158,72.569
  Bottom Layer w0.508: R33.1@126.792,90.617 R33.1 ; R37.2@126.826,88.796 126.787,88.835 R33.1 ; v1(135.306,100.965) 135.306,92.532 133.386,90.613 R33.1
Boost_OUT: pad.6 R36.2 RT3.1 | length 25.9
  Bottom Layer w0.6: R36.2 129.44,72.185 130.413,71.212 130.413,60.442 131.928,58.928 v1(138.786,58.928) v1(139.522,58.928) v1(140.259,58.928) v1(140.995,58.928)
  other v1: 141.732,58.928 142.469,58.928 143.205,58.928 138.786,59.563 139.522,59.563 140.259,59.563 140.995,59.563 141.732,59.563 142.469,59.563 143.205,59.563 138.786,60.198 139.522,60.198 140.259,60.198 140.995,60.198 141.732,60.198 142.469,60.198 143.205,60.198 138.786,60.833 139.522,60.833 140.259,60.833 140.995,60.833 141.732,60.833 142.469,60.833 143.205,60.833 138.786,61.468 139.522,61.468 140.259,61.468 140.995,61.468 141.732,61.468 142.469,61.468 143.205,61.468 138.786,62.103 139.522,62.103 140.259,62.103 140.995,62.103 141.732,62.103 142.469,62.103 143.205,62.103 138.786,62.738 139.522,62.738 140.259,62.738 140.995,62.738 141.732,62.738 142.469,62.738 143.205,62.738 138.786,63.373 139.522,63.373 140.259,63.373 140.995,63.373 141.732,63.373 142.469,63.373 143.205,63.373
"CAN H": 120R.1 S1.1 U2.7 | length 7.1
  Bottom Layer w0.254: S1.1 60.242,74.58 120R.1 60.565,74.625 U2.7
"CAN L": 120R.2 S1.2 U2.6 | length 7.2
  Bottom Layer w0.254: S1.2 60.161,73.33 120R.2 60.718,73.355 U2.6
"CAN RX": U2.4 U3.45 | length 22
  Top Layer w0.254: v1(66.319,77.445) v1(68.174,77.445)
  Bottom Layer w0.254: v1(66.319,77.445) 66.319,72.568 66.802,72.085 U2.4 ; v1(68.174,77.445) 68.174,83.82 68.631,84.277 70.663,84.277 70.911,84.526 U3.45
"CAN TX": U2.1 U3.46 | length 15.8
  Bottom Layer w0.254: U2.1 67.589,75.895 67.259,76.225 67.259,84.201 67.932,84.874 70.168,84.874 70.411,85.118 U3.46
CAP_OUT: OP1.1 U3.38 | length 36.5
  Top Layer w0.254: v1(69.418,70.663) 70.688,70.663 70.917,70.891 70.917,75.717 71.247,76.048 75.438,76.048 75.844,76.454 v1(75.844,78.08)
  Bottom Layer w0.254: U3.38 74.411,78.446 74.741,78.117 75.807,78.117 v1(75.844,78.08)
  Bottom Layer w0.4: OP1.1 63.951,65.735 64.186,65.97 64.186,70.409 64.44,70.663 v1(69.418,70.663)
DGND: 
ENABLE: CU1.7 U1.6 | length 8.4
  Bottom Layer w0.254: U1.6 66.462,61.173 66.7,60.935 66.7,56.617 67.047,56.27 CU1.7
G_LED: R11.2 U3.14 | length 16.1
  Top Layer w0.254: R11.2 61.366,92.949 61.366,94.031 61.646,94.31 64.44,94.31 64.745,94.615 64.745,98.12 64.999,98.374 66.523,98.374 v1(66.548,98.349)
  Bottom Layer w0.254: v1(66.548,98.349) 66.573,98.374 69.418,98.374 69.911,97.881 U3.14
GND: C1.2 C2.1 C3.2 C4.2 C5.2 C6.2 C7.1 C8.2 C9.1 C10.2 C11.2 C12.2 C13.1 C14.2 C15.2 C16.2 C17.1 C18.1 C19.1 C20.1 C21.2 C22.2 C23.2 C24.2 C25.2 C27.2 C28.2 C29.2 Cap1.2 CR1.2 CU1.9 E1.2 E2.2 L2.2 L3.2 L4.2 L5.2 L6.2 LED1.2 M1.2 OP1.3 pad.5@115.367,44.856 pad.5@121.759,44.856 PU1.1 PU2.1 PU3.2 PU4.4 PU4.5 PU4.6 PU4.7 PU4.8 Q3.1 Q3.3@82.052,71.603 Q3.3@82.052,72.873 R2.1 R3.2 R7.2 R10.2 R17.2 R18.2 R23.2 R24.2 S2.2 SS1.1 U1.2 U2.2 U2.8 U3.23 U3.35 U3.47 VCC1.2 | length 36.2
  Bottom Layer w0.254: v1(65.087,84.519) 65.087,85.661 C12.2@65.1,85.674 ; C12.2 C12.2@65.1,85.674 ; 66.739,52.971 66.751,52.959 ; v1(66.739,53.927) 66.739,54.801 67.208,55.27 CU1.9 ; U1.2 69.113,60.224 v1(69.139,60.198) ; U3.47 69.911,85.985 69.601,85.674 C12.2@65.1,85.674 ; U3.23 74.411,97.678 74.701,97.968 79.019,97.968 79.248,97.739 C10.2 80.362,97.218 v1@80.375,97.231 ; C15.2 76.737,103.251 76.886,103.4 76.886,104.677 77.035,104.826 C14.2@77.88,104.826 ; U3.35 79.06,89.266 79.248,89.078 79.248,88.595 ; C11.2@79.248,87.376 C11.2 79.248,88.595 ; v1(80.035,88.621) 79.273,88.621 79.248,88.595
  Bottom Layer w0.5: C24.2 66.483,52.691 66.751,52.959 ; 66.739,52.971 v1(66.739,53.927) ; C16.2 C15.2 ; C14.2@77.88,104.826 79.882,104.826 v1(79.908,104.851)
  other v1: 60.274,43.739 118.694,43.739 144.094,43.739 61.544,46.279 69.164,46.279 74.244,46.279 55.194,48.819 57.734,48.819 60.274,48.819 67.894,48.819 70.434,48.819 72.974,48.819 113.614,48.819 86.944,51.359 88.214,53.899 111.074,53.899 86.944,56.439 80.594,58.979 85.674,58.979 88.214,58.979 62.329,63.152 146.634,64.059 56.464,66.599 86.944,66.599 145.364,66.599 147.904,66.599 150.444,66.599 57.175,66.624 73.736,67.92 76.784,71.679 55.194,74.219 98.374,74.219 142.824,76.759 145.364,76.759 64.084,77.521 55.194,79.299 65.354,79.299 78.054,79.299 80.594,79.299 90.754,79.299 144.094,79.299 81.864,81.839 147.904,81.839 150.444,81.839 93.294,84.379 55.651,84.963 76.784,86.919 94.564,86.919 97.104,86.919 145.364,86.919 150.444,86.919 95.834,89.459 98.374,89.459 146.634,89.459 149.174,89.459 145.364,91.999 80.594,94.539 84.404,97.079 86.944,97.079 80.391,97.231 88.214,99.619 98.374,99.619 69.164,102.159 86.944,102.159 89.484,102.159 97.104,102.159 99.644,102.159 88.214,104.699 100.914,104.699 103.454,104.699 105.994,104.699 108.534,104.699 113.614,104.699 116.154,104.699 123.774,104.699 126.314,104.699 128.854,104.699 131.394,104.699 133.934,104.699 136.474,104.699 139.014,104.699 141.554,104.699 144.094,104.699 67.005,106.223 73.66,106.375 63.652,106.426 122.504,107.239 125.044,107.239 127.584,107.239 130.124,107.239 132.664,107.239 135.204,107.239 137.744,107.239 140.284,107.239 142.824,107.239
I/O1_PWM: U1.1 U3.40 | length 42.7
  Bottom Layer w0.254: U1.1 67.858,61.138 69.088,61.138 78.74,61.138 79.273,61.671 79.273,76.276 78.842,76.708 73.965,76.708 73.411,77.261 U3.40
I/O2_Enable: R10.1 U1.3 U3.39 | length 45.3
  Bottom Layer w0.254: U1.3@67.787,59.101 67.822,59.135 U1.3 R10.1@72.251,59.274 ; R10.1@72.251,59.405 72.251,60.135 72.601,60.485 79.561,60.485 79.934,60.858 79.934,76.683 79.324,77.292 74.295,77.292 73.911,77.676 U3.39
"IICI  SCL": R28.2 R30.2 U3.21 U5.5 U6.5 | length 106.1
  POWER w0.254: v1(78.943,99.949) 83.261,99.949 83.769,100.457 83.769,107.798 84.217,108.245 118.653,108.245 119.228,107.671 v1(119.228,74.854)
  Bottom Layer w0.254: U3.21 73.411,99.167 74.193,99.949 v1(78.943,99.949) ; R30.2 116.929,74.905 ; R28.2 113.22,82.503 113.368,82.652 116.945,82.652 ; U6.5 116.929,74.905 ; U5.5@116.945,81.473 116.945,82.652 ; v1(119.228,74.854) 119.177,74.905 116.929,74.905 ; v1(119.228,82.601) 119.177,82.652 116.945,82.652
"IICI  SCL_BA": R26.2 U3.42 U4.5 | length 96.2
  POWER w0.254: v1(72.923,92.507) 72.923,101.295 73.838,102.21 82.067,102.21 82.55,102.692 82.55,109.017 82.998,109.464 120.025,109.464 120.777,108.712 120.777,90.195 v1(120.726,90.145)
  Bottom Layer w0.254: U3.42 72.411,91.941 72.923,92.453 v1(72.923,92.507) ; R26.2 113.269,89.305 U4.5 ; U4.5@116.974,89.305 U4.5 ; v1(120.726,90.145) 120.701,90.17 117.297,90.17 116.929,89.802 U4.5
"IICI  SDA": R27.2 R29.2 U3.22 U5.4 U6.4 | length 101.5
  POWER w0.254: v1(79.959,99.289) 83.82,99.289 84.303,99.771 84.303,106.981 84.992,107.671 118.034,107.671 118.464,107.241 v1(118.464,80.95) 118.477,80.936 118.477,73.115 v1(118.491,73.101)
  Bottom Layer w0.254: U3.22 73.911,98.753 74.447,99.289 v1(79.959,99.289) ; R29.2 116.908,73.102 U6.4 116.94,73.112 118.48,73.112 v1(118.491,73.101) ; R27.2 115.062,79.731 115.214,79.883 115.214,80.747 115.424,80.957 U5.4 116.933,80.953 118.46,80.953 v1(118.464,80.95)
"IICI  SDA_BA": R25.2 U3.43 U4.4 | length 95.6
  POWER w0.254: v1(74.32,93.523) 74.32,101.219 74.778,101.676 82.601,101.676 83.16,102.235 83.16,108.433 83.607,108.88 119.313,108.88 119.939,108.255 v1(119.939,88.798)
  Bottom Layer w0.254: U3.43 71.911,93.044 72.39,93.523 v1(74.32,93.523) ; R25.2 113.238,87.579 114.757,87.579 115.011,87.833 115.011,88.443 115.374,88.805 119.75,88.805 119.819,88.875 v1@119.888,88.875
Moter: M1.1 PD1.2 PD2.2 PD4.2 PD6.2 | length 0.1
  Top Layer w3: PD2.2@122.911,56.845 PD2.2
NetBOOST_PM1_1: pad.5@108.974,44.856 Q1.2
  other v1: 93.116,48.971 93.853,48.971 94.59,48.971 95.326,48.971 96.063,48.971 96.799,48.971 97.536,48.971 93.116,49.606 93.853,49.606 94.59,49.606 95.326,49.606 96.063,49.606 96.799,49.606 97.536,49.606 93.116,50.241 93.853,50.241 94.59,50.241 95.326,50.241 96.063,50.241 96.799,50.241 97.536,50.241 93.116,50.876 93.853,50.876 94.59,50.876 95.326,50.876 96.063,50.876 96.799,50.876 97.536,50.876 93.116,51.511 93.853,51.511 94.59,51.511 95.326,51.511 96.063,51.511 96.799,51.511 97.536,51.511 93.116,52.146 93.853,52.146 94.59,52.146 95.326,52.146 96.063,52.146 96.799,52.146 97.536,52.146 93.116,52.781 93.853,52.781 94.59,52.781 95.326,52.781 96.063,52.781 96.799,52.781 97.536,52.781 93.116,53.416 93.853,53.416 94.59,53.416 95.326,53.416 96.063,53.416 96.799,53.416 97.536,53.416
NetC7_2: C7.2 PU3.3 RL1.2 | length 6.4
  Top Layer w1: RL1.2 PU3.3@63.768,49.833
NetC13_2: C13.2 C14.1 R4.2 R5.1 | length 14.1
  Bottom Layer w0.254: R4.2 R5.1 71.959,101.319 72.365,100.914 77.495,100.914 77.905,101.324 C14.1 C13.2
NetC19_2: C19.2 U3.6 Y1.1 | length 19.8
  Bottom Layer w0.254: C19.2 55.042,91.897 55.673,91.266 58.801,91.266 ; Y1.1 58.805,91.271 58.801,91.266 ; U3.6 58.801,91.266
NetC20_2: C20.2 U3.5 Y1.2 | length 18.9
  Bottom Layer w0.254: C20.2 55.118,88.405 55.118,89.891 55.994,90.766 58.801,90.766 ; Y1.2 58.797,90.762 58.801,90.766 ; U3.5 58.801,90.766
NetC21_1: C21.1 D1.2 U3.1 | length 17.8
  Top Layer w0.254: C21.1 v1(62.738,80.696)
  Bottom Layer w0.254: D1.2 v1(62.738,80.696) 62.763,80.721 62.763,88.468 63.061,88.766 U3.1
NetC26_1: C26.1 CU1.2 D2.2 | length 6.2
  Bottom Layer w0.254: D2.2 61.29,54.508 62.052,55.27 CU1.2
  Bottom Layer w0.5: D2.2 C26.1@60.274,56.629
NetC26_2: C26.2 CU1.4 L7.1 Q2.1 Q2.3@90.297,71.603 Q2.3@90.297,72.873 Q3.2 R20.2 | length 56.8
  Top Layer w0.3: v1(55.042,59.131) 55.054,59.118 62.065,59.118 v1(62.078,59.106)
  POWER w0.5: v1@55.17,65.075 83.426,65.075 83.718,65.368 v1(83.718,70.282)
  Bottom Layer w0.254: v1(62.078,59.106) 62.052,59.08 62.052,56.54 62.322,56.27 CU1.4
  Bottom Layer w0.3: R20.2@55.042,60.819 R20.2@55.143,60.921
  Bottom Layer w0.5: R20.2@55.042,60.819 55.042,57.633 56.032,56.642 C26.2 ; R20.2@55.143,60.921 v1(55.143,65.075)
  other v1: 84.455,70.282 85.192,70.282 85.928,70.282 86.665,70.282 87.401,70.282 88.138,70.282 83.718,70.917 84.455,70.917 85.192,70.917 85.928,70.917 86.665,70.917 87.401,70.917 88.138,70.917 83.718,71.552 84.455,71.552 85.192,71.552 85.928,71.552 86.665,71.552 87.401,71.552 88.138,71.552 83.718,72.187 84.455,72.187 85.192,72.187 85.928,72.187 86.665,72.187 87.401,72.187 88.138,72.187 83.718,72.822 84.455,72.822 85.192,72.822 85.928,72.822 86.665,72.822 87.401,72.822 88.138,72.822 83.718,73.457 84.455,73.457 85.192,73.457 85.928,73.457 86.665,73.457 87.401,73.457 88.138,73.457 83.718,74.092 84.455,74.092 85.192,74.092 85.928,74.092 86.665,74.092 87.401,74.092 88.138,74.092 83.718,74.727 84.353,74.727 84.988,74.727 85.623,74.727 86.258,74.727 86.893,74.727 87.528,74.727 88.163,74.727 83.718,75.362 84.353,75.362 84.988,75.362 85.623,75.362 86.258,75.362 86.893,75.362 87.528,75.362 88.163,75.362 83.718,75.997 84.353,75.997 84.988,75.997 85.623,75.997 86.258,75.997 86.893,75.997 87.528,75.997 88.163,75.997
NetC33_1: C33.1 R31.1 U4.10 | length 6.7
  Bottom Layer w0.254: U4.10 123.286,87.305 123.546,87.046 123.546,85.522 123.711,85.357 C33.1 125.12,85.332 R31.1
NetC33_2: C33.2 R37.1 U4.9 | length 5.2
  Bottom Layer w0.254: U4.9 125.109,87.805 ; C33.2 125.109,86.97 125.109,87.805 ; R37.1 125.109,87.91 125.109,87.805
NetC34_1: C34.1 R34.1 U5.10 | length 6.5
  Bottom Layer w0.254: U5.10 123.235,79.457 123.469,79.223 123.469,78.003 123.947,77.526 C34.1 126.776,77.526 R34.1
NetC34_2: C34.2 R38.1 U5.9 | length 5.2
  Bottom Layer w0.254: U5.9 125.021,79.957 125.095,79.883 ; C34.2@125.095,79.14 125.095,79.883 ; R38.1@125.095,81.019 125.095,79.883
NetC35_1: C35.1 R36.1 U6.10 | length 5.8
  Bottom Layer w0.254: U6.10 123.322,71.623 123.571,71.374 123.571,70.764 123.838,70.498 126.835,70.498 R36.1
NetC35_2: C35.2 R39.1 U6.9 | length 5.1
  Bottom Layer w0.254: U6.9 125.07,72.123 C35.2 R39.1
NetCR1_1: CR1.1 R16.2 U3.7 | length 20
  Bottom Layer w0.254: R16.2 63.976,103.162 CR1.1 62.916,103.251 62.586,102.921 62.586,92.05 62.869,91.766 U3.7
NetCU1_3: CU1.3 D3.2 R19.1 | length 8.5
  Bottom Layer w0.254: D3.2 60.291,58.759 61.205,58.759 61.493,58.471 61.493,56.185 61.908,55.77 CU1.3 ; R19.1@60.274,60.872 R19.1
  Bottom Layer w0.5: D3.2 R19.1@60.274,60.872
NetCU1_6: CU1.6 R23.1 | length 3.3
  Bottom Layer w0.254: CU1.6 72.202,56.77 R23.1
NetCU1_10: CU1.10 D4.2 R22.1 | length 5.4
  Bottom Layer w0.254: CU1.10 72.204,54.77 D4.2 D4.2@72.251,54.723
  Bottom Layer w0.5: R22.1 D4.2@72.251,54.723
NetD3_1: D3.1 Q2.3@90.297,70.333 R19.2 R20.1 | length 44
  Top Layer w0.7: v1(90.272,68.377) Q2.3@90.272,70.273
  POWER w0.5: v1(73.127,64.008) 89.281,64.008 90.297,65.024 ; 90.272,65.049 v1(90.272,68.377)
  Bottom Layer w0.5: D3.1 56.806,58.942 R20.1 R19.2 58.586,63.183 59.411,64.008 v1(73.127,64.008)
NetD4_1: D4.1 Q3.3@82.052,70.333 R22.2 R24.1 | length 36.3
  Top Layer w0.7: v1(82.042,68.326) 82.052,68.336 Q3.3@82.052,70.333
  Bottom Layer w0.5: D4.1 75.54,53.086 75.082,52.629 R22.2 R24.1 73.951,49.391 74.701,48.641 81.178,48.641 82.052,49.515 82.052,68.316 v1(82.042,68.326)
NetL1_1: L1.1 PU4.2 SS1.2 | length 14.2
  Top Layer w0.5: PU4.2 80.035,55.372 80.645,54.762 80.645,51.308 81.559,50.394 83.838,50.394 SS1.2@83.954,50.51 ; SS1.2 L1.1@83.979,54.559
NetL2_1: L2.1 R8.2 | length 2
  Top Layer w0.254: L2.1 L2.1@57.628,98.933
  Top Layer w0.5: L2.1@57.628,98.933 R8.2
NetL3_1: L3.1 R9.1 | length 2
  Top Layer w0.254: R9.1@59.515,95.92 R9.1
  Top Layer w0.5: L3.1 R9.1@59.515,95.92
NetL4_1: L4.1 R11.1 | length 2
  Top Layer w0.254: R11.1@59.529,92.856 R11.1
  Top Layer w0.5: L4.1 R11.1@59.529,92.856
NetL5_1: L5.1 R12.1 | length 2
  Top Layer w0.254: R12.1@59.543,89.792 R12.1
  Top Layer w0.5: L5.1 R12.1@59.543,89.792
NetL6_1: L6.1 R13.1 | length 2
  Top Layer w0.254: R13.1@59.545,86.728 R13.1
  Top Layer w0.5: L6.1 R13.1@59.545,86.728
NetLED1_1: LED1.1 R21.1 | length 2.3
  Top Layer w0.508: R21.1 148.112,85.09 LED1.1
NetOP1_2: OP1.2 R18.1 | length 2.4
  Bottom Layer w0.6: R18.1 OP1.2
NetOP1_4: OP1.4 Q1.1@92.786,55.108 RPL1.2 | length 30.6
  Top Layer w0.5: v1(89.611,55.143) 89.638,55.143 89.674,55.108 Q1.1@92.786,55.108
  POWER w0.5: v1(74.588,62.366) 75.246,61.708 88.484,61.708 89.611,60.581 v1(89.611,55.143)
  Bottom Layer w0.5: v1(74.588,62.366) RPL1.2
  Bottom Layer w0.6: OP1.4@71.584,65.747 74.41,65.747 RPL1.2@74.422,65.735
  Bottom Layer w0.8: OP1.4 OP1.4@71.584,65.747
NetPU4_3: PU4.3 R1.1 R2.2 | length 8.1
  Top Layer w0.5: R2.2 77,59.838 76.145,59.838 75.692,59.385 75.692,56.935 75.985,56.642 PU4.3 ; R2.2@77.013,59.915 R1.1@77.013,61.727
NetR17_1: R17.1 U3.44 | length 8.2
  Bottom Layer w0.254: R17.1 69.672,83.439 69.952,83.718 70.968,83.718 71.411,84.162 U3.44
NetR40_1: R40.1 U6.2 | length 4.1
  Bottom Layer w0.254: R40.1 114.402,71.298 115.226,72.123 U6.2
O_LED: R9.2 U3.15 | length 15.4
  Top Layer w0.254: R9.2 61.251,96.913 61.62,97.282 63.983,97.282 64.237,97.536 64.237,98.984 64.465,99.212 65.855,99.212 v1(65.888,99.18)
  Bottom Layer w0.254: v1(65.888,99.18) 65.92,99.212 70.028,99.212 70.411,98.829 U3.15
Power_Cap: Cap1.1 Q1.1@96.596,55.108 Q1.3 R32.1 R38.2 RPL1.1 RT2.2 | length 47.2
  Top Layer w3: RT2.2 RT2.2@140.1,72.771
  POWER w0.5: v1(76.18,62.858) 89.745,62.858 90.627,61.976 90.627,60.173 91.491,59.309 v1(94.285,59.309) ; v1@94.234,54.839 94.266,54.87 94.266,55.48 v1(94.285,55.499)
  Bottom Layer w0.5: v1(76.18,62.858) 76.18,65.676 RPL1.1@76.302,65.797 ; R32.1 R38.2 139.511,81.037 140.081,80.467 v1(140.081,72.847)
  other v1: 94.285,54.864 95.021,54.864 95.758,54.864 96.495,54.864 97.231,54.864 97.968,54.864 95.021,55.499 95.758,55.499 96.495,55.499 97.231,55.499 97.968,55.499 94.285,56.134 95.021,56.134 95.758,56.134 96.495,56.134 97.231,56.134 97.968,56.134 94.285,56.769 95.021,56.769 95.758,56.769 96.495,56.769 97.231,56.769 97.968,56.769 94.285,57.404 95.021,57.404 95.758,57.404 96.495,57.404 97.231,57.404 97.968,57.404 94.285,58.039 95.021,58.039 95.758,58.039 96.495,58.039 97.231,58.039 97.968,58.039 94.285,58.674 95.021,58.674 95.758,58.674 96.495,58.674 97.231,58.674 97.968,58.674 95.021,59.309 95.758,59.309 96.495,59.309 97.231,59.309 97.968,59.309 106.375,64.897 107.112,64.897 107.848,64.897 108.585,64.897 109.322,64.897 110.058,64.897 110.795,64.897 106.375,65.532 107.112,65.532 107.848,65.532 108.585,65.532 109.322,65.532 110.058,65.532 110.795,65.532 106.375,66.167 107.112,66.167 107.848,66.167 108.585,66.167 109.322,66.167 110.058,66.167 110.795,66.167 106.375,66.802 107.112,66.802 107.848,66.802 108.585,66.802 109.322,66.802 110.058,66.802 110.795,66.802 106.375,67.437 107.112,67.437 107.848,67.437 108.585,67.437 109.322,67.437 110.058,67.437 110.795,67.437 106.375,68.072 107.112,68.072 107.848,68.072 108.585,68.072 109.322,68.072 110.058,68.072 110.795,68.072 106.375,68.707 107.112,68.707 107.848,68.707 108.585,68.707 109.322,68.707 110.058,68.707 110.795,68.707 106.375,69.342 107.112,69.342 107.848,69.342 108.585,69.342 109.322,69.342 110.058,69.342 110.795,69.342
Power_Charge: C27.1 C28.1 C29.1 L7.2 PD3.1 PD5.1 R21.2 | length 3.4
  Top Layer w0.508: PD5.1@140.754,85.092 144.12,85.092 R21.2
  other v1: 106.248,91.923 106.985,91.923 107.721,91.923 108.458,91.923 109.195,91.923 109.931,91.923 106.248,92.558 106.985,92.558 107.721,92.558 108.458,92.558 109.195,92.558 109.931,92.558 106.248,93.193 106.985,93.193 107.721,93.193 108.458,93.193 109.195,93.193 109.931,93.193 106.248,93.828 106.985,93.828 107.721,93.828 108.458,93.828 109.195,93.828 109.931,93.828 106.248,94.463 106.985,94.463 107.721,94.463 108.458,94.463 109.195,94.463 109.931,94.463 106.248,95.098 106.985,95.098 107.721,95.098 108.458,95.098 109.195,95.098 109.931,95.098 106.248,95.733 106.985,95.733 107.721,95.733 108.458,95.733 109.195,95.733 109.931,95.733 106.248,96.368 106.985,96.368 107.721,96.368 108.458,96.368 109.195,96.368 109.931,96.368 90.78,97.917 91.415,97.917 92.05,97.917 92.685,97.917 93.32,97.917 93.955,97.917 94.59,97.917 95.225,97.917 90.78,98.654 91.415,98.654 92.05,98.654 92.685,98.654 93.32,98.654 93.955,98.654 94.59,98.654 95.225,98.654 90.78,99.39 91.415,99.39 92.05,99.39 92.685,99.39 93.32,99.39 93.955,99.39 94.59,99.39 95.225,99.39 90.78,100.127 91.415,100.127 92.05,100.127 92.685,100.127 93.32,100.127 93.955,100.127 94.59,100.127 95.225,100.127 90.78,100.863 91.415,100.863 92.05,100.863 92.685,100.863 93.32,100.863 93.955,100.863 94.59,100.863 95.225,100.863 90.78,101.6 91.415,101.6 92.05,101.6 92.685,101.6 93.32,101.6 93.955,101.6 94.59,101.6 95.225,101.6
Power_Charge_OUT: PD3.2 PD5.2 R34.2 RT2.1 | length 14.4
  Bottom Layer w0.5: R34.2 126.828,79.174 134.491,79.174 135.484,78.181 v1(135.484,72.886)
PWM: CU1.8 U1.4 | length 7.1
  Bottom Layer w0.254: U1.4 65.872,59.274 65.904,59.242 66.091,59.055 66.091,55.982 66.302,55.77 CU1.8
PWM_LED: R13.2 U3.12 | length 14
  Top Layer w0.254: R13.2 61.27,86.716 65.253,86.716 65.888,87.351 v1(65.888,94.234)
  Bottom Layer w0.254: v1(65.888,94.234) 65.911,94.257 68.053,94.257 U3.12
R_LED: R8.1 U3.16 | length 14.5
  Top Layer w0.254: R8.1@61.301,98.933 61.311,98.943 61.311,99.665 61.697,100.051 66.523,100.051 v1(66.548,100.025)
  Bottom Layer w0.254: v1(66.548,100.025) 70.256,100.025 70.911,99.37 U3.16
SUPERCAP_OUT: PD2.1 PD4.1 R35.1 R39.2 RT3.2 | length 21
  Bottom Layer w0.6: R35.1 R39.2 131.242,73.965 132.334,72.873 132.334,63.144 133.35,62.128 v1(135.509,62.128)
SWCLK: S2.4 U3.37 | length 38.9
  Bottom Layer w0.254: U3.37 74.911,84.55 75.26,84.201 80.797,84.201 81.81,85.214 81.81,106.734 81.204,107.34 76.759,107.34 S2.4
SWDIO: S2.3 U3.34 | length 30.3
  Bottom Layer w0.254: S2.3@72.974,108.61 74.905,106.68 80.62,106.68 81.229,106.07 81.229,90.17 80.825,89.766 U3.34
VB_TP: R35.2 U6.8 | length 6
  Bottom Layer w0.254: U6.8 123.219,72.623 123.647,73.05 123.647,75.514 123.8,75.667 R35.2
VBUS_TP: R33.2 U4.8 | length 5.4
  Bottom Layer w0.254: U4.8 123.306,88.305 123.52,88.519 123.52,90.464 123.669,90.613 R33.2
VCAP_TP: R32.2 U5.8 | length 5.2
  Bottom Layer w0.254: U5.8 123.23,80.457 123.622,80.848 123.622,82.626 123.774,82.779 R32.2
VDDA: C15.1 C16.1 R5.2 U3.9 | length 30.3
  Top Layer w0.254: v1(70.891,100.94) 70.891,105.896 71.04,106.045 v1(71.958,106.045)
  Bottom Layer w0.254: U3.9 64.028,92.766 63.754,93.04 63.754,100.355 64.338,100.94 v1(70.891,100.94) ; v1(71.958,106.045) 71.958,104.863 R5.2 73.9,104.862 75.891,104.862 C15.1
VSSA: R7.1 U3.8 | length 20
  Bottom Layer w0.254: R7.1 67.954,101.914 67.691,101.651 63.652,101.651 63.17,101.168 63.17,92.532 63.436,92.266 U3.8
pads on no net: CU1.5 PU1. PU2. S1.0 U2.5 U3.2 U3.3 U3.4 U3.10 U3.11 U3.17 U3.18 U3.19 U3.20 U3.25 U3.26 U3.27 U3.28 U3.29 U3.30 U3.31 U3.32 U3.33 U3.41 U4.3 U5.3 U6.3

## Polygon pours and split planes (outlines as drawn)
GND on POWER "NONET_L-01_P-001" (solid, remove dead copper, pour order 1): 51.981,111.283 51.956,111.257 51.956,40.818 91.249,40.818 91.249,65.588 82.372,65.588 82.372,110.881
GND on GND "NONET_L-01_P-001" (solid, remove dead copper, pour order 4): 52.032,111.308 52.006,111.283 52.006,40.843 91.3,40.843 91.3,65.613 82.372,65.613 82.372,110.907
GND on Top Layer "NONET_L-01_P-001" (solid, remove dead copper, pour order 2): 51.511,111.43 152.248,111.43 153.213,110.465 153.213,40.513 51.918,40.513 51.791,40.386
GND on Bottom Layer "NONET_L-01_P-001" (solid, remove dead copper, pour order 3): 51.486,111.43 51.664,111.608 153.162,111.608 153.162,40.818 152.654,40.31 51.791,40.31

## Keep-outs
Keep-Out Layer:
  lines w0.254: 52.32,43.483 ccw(c54.771,43.496) 54.784,41.045 ; 52.324,43.485 52.324,108.56 ; 52.324,108.585 cw(c54.775,108.598) 54.762,111.049 ; 54.764,41.045 149.884,41.045 ; 54.812,111.047 149.912,111.047 ; 149.864,111.047 cw(c149.877,108.596) 152.328,108.609 ; 149.886,41.041 ccw(c149.873,43.492) 152.324,43.505 ; 152.324,43.485 152.324,108.636

## Other copper
Top Layer:
  rectangle net Power_Charge: 105.842,91.699 136.779,96.699
  rectangle net Power_Charge: 133.375,84.328 141.453,91.719
  rectangle net Power_Charge: 90.496,97.511 95.496,106.756
  rectangle net Moter: 115.367,48.458 147.396,54.458
  rectangle net Battery_out: 94.005,78.207 104.546,83.207
  rectangle net Moter: 145.867,51.689 151.867,57.506
  rectangle net Battery_out: 76.937,43.586 78.943,54.407
  rectangle net Power_Cap: 93.726,54.534 98.45,59.563
  rectangle net Battery: 146.486,95.58 151.486,99.314
  region net Power_Cap: 151.638,70.256 151.638,75.256 142.164,75.256 142.164,70.256
  region net Battery_out: 96.582,69.85 96.582,79.731 91.582,79.731 91.582,69.85
  rectangle net NetBOOST_PM1_1: 92.815,48.692 97.815,53.746
  rectangle net NetC26_2: 83.388,71.272 90.907,76.272
  rectangle net Battery_out: 99.568,47.371 104.568,97.815
  rectangle net Battery_out: 103.276,98.501 137.058,103.501
  rectangle net Battery: 138.582,98.501 146.888,103.501
  rectangle net Battery_out: 99.619,55.143 112.268,63.678
  rectangle net SUPERCAP_OUT: 126.289,55.169 136.902,63.729
  rectangle net Boost_OUT: 138.481,58.191 143.481,63.691
  rectangle net Moter: 113.078,51.105 125.578,63.932
  rectangle net Power_Cap: 138.506,68.047 143.506,74.32
  rectangle net Battery_out: 77.394,42.469 99.568,47.469
  rectangle net Power_Cap: 106.045,64.618 138.913,69.618
  rectangle net Power_Charge: 91.389,103.581 99.009,106.782
  rectangle net Power_Charge_OUT: 131.953,71.222 136.953,83.668
  rectangle net Power_Charge_OUT: 132.982,78.283 141.808,83.693
  pour cut-out: 104.584,94.31 130.975,94.31 130.975,68.25 104.584,68.25
  region net Power_Charge: 138.008,89.525 134.366,93.167 134.366,96.697 139.504,96.697 141.453,94.749 141.453,89.516
  region net Power_Charge: 133.452,89.713 133.452,91.846 131.801,91.846
  region net Moter: 113.078,51.105 115.392,51.105 115.392,48.483 115.367,48.458
  region net Power_Cap: 143.984,71.866 140.341,68.224 138.481,68.224 138.481,74.498 139.243,75.26 143.993,75.26
  region net Battery: 148.092,96.3 144.449,99.943 144.449,103.473 149.587,103.473 151.486,101.575 151.486,96.291
  region net Battery_out: 75.133,43.434 77.267,43.434 77.267,45.085
  region net Battery_out: 77.394,42.469 76.81,43.053 76.81,43.586 77.394,43.586
  region net Battery_out: 78.791,49.301 78.791,47.168 80.442,47.168
  region net Moter: 126.848,53.975 124.714,53.975 124.714,55.626
  region net Power_Charge_OUT: 136.563,74.066 136.563,78.283 141.808,78.283
  region net Battery_out: 106.604,55.334 104.47,55.334 104.47,53.683
  region net Battery_out: 106.604,63.551 104.47,63.551 104.47,65.202
  region net Battery_out: 98.755,80.111 94.814,76.17 91.582,76.17 91.582,81.422 93.367,83.207 98.763,83.207
  region net Battery_out: 97.587,78.372 99.72,78.372 99.72,76.721
  region net Battery_out: 97.587,83.045 99.72,83.045 99.72,84.696
  region net Battery_out: 106.737,98.762 104.44,96.465 99.568,96.465 99.568,100.584 102.485,103.501 106.749,103.501
  region net Power_Cap: 146.672,71.516 142.431,71.516 142.431,68.235
  region net Power_Cap: 136.437,68.746 139.345,71.654 143.608,71.654 143.608,67.535 140.691,64.618 136.426,64.618
  region net Moter: 144.467,54.272 145.924,55.728 151.867,55.728 151.867,51.689 148.641,48.463 144.452,48.463
  region net Battery_out: 97.396,46.113 100.788,49.505 104.568,49.505 104.568,45.386 101.651,42.469 97.387,42.469
POWER:
  pour cut-out: 105.133,94.132 131.445,94.132 131.445,68.072 104.978,68.072
GND:
  pour cut-out: 105.004,94.067 131.547,94.067 131.547,67.996 105.004,67.996
Bottom Layer:
  region net Power_Charge: 110.185,96.723 91.948,96.723 91.948,91.723 110.185,91.723
  region net Power_Cap: 98.603,54.432 98.603,63.551 93.603,63.551 93.603,54.432
  rectangle net Power_Cap: 96.571,64.618 111.15,69.618
  rectangle net NetBOOST_PM1_1: 92.812,48.692 106.782,53.692
  region net NetC26_2: 88.417,69.901 88.417,95.453 83.417,95.453 83.417,69.901
  rectangle net Boost_OUT: 125.273,42.469 138.354,47.469
  rectangle net Boost_OUT: 138.481,47.93 143.481,63.703
  rectangle net NetBOOST_PM1_1: 106.477,42.545 111.477,50.013
  rectangle net 12V: 63.576,52.316 64.576,54.915
  region net Power_Charge: 97.409,96.456 95.275,96.456 95.275,98.107
  region net Power_Charge: 90.881,91.723 90.5,92.104 90.5,92.257 90.5,101.981 95.504,101.981 95.504,91.723
  region net Boost_OUT: 143.394,45.143 140.719,42.469 136.224,42.469 136.224,46.483 139.144,49.403 143.405,49.403
  region net Power_Cap: 93.684,68.83 94.472,69.618 100.635,69.618 100.635,64.668 98.323,62.357 93.667,62.357
  region net NetBOOST_PM1_1: 108.767,53.692 111.481,50.978 111.481,46.482 107.467,46.482 104.546,49.402 104.546,53.692
  pour cut-out: 105.004,94.143 131.445,94.143 131.445,68.072 105.004,68.072

## Silkscreen, mask and mechanical layers (free items; w line width, h text height)
Top Overlay:
  drawing of 3082 lines, arcs and shapes, not listed
  text "V  G  D  C" at 68.174,105.791 h1.52
  text "电源" at 146.756,88.038 h3
  text "充电状态灯" at 144.501,86.219 h1.52
  text "超电" at 146.473,81.228 h3
  text "底盘" at 146.431,63.778 h3
  text "IN" at 111.303,46.944 h2.5
  text "GND" at 116.078,46.916 h2.5
  text "OUT" at 122.834,46.916 h2.5
Bottom Overlay:
  text "H" at 56.896,76.124 h1.52 r270
  text "L" at 56.896,72.771 h1.52 r270
Top Solder:
  rectangle: 126.594,55.423 136.627,63.424
  rectangle: 94.056,54.813 97.307,59.258
  rectangle: 83.82,71.399 90.703,75.667
  rectangle: 106.375,64.897 110.795,69.342
  rectangle: 77.14,43.459 80.874,46.457
  rectangle: 138.786,58.318 143.18,63.373
  region: 126.365,52.667 124.231,52.667 124.231,54.318
  region: 119.456,52.565 121.59,52.565 121.59,54.216
  lines w3: 115.639,56.897 115.639,53.5 117.907,51.232 124.054,51.232 145.157,51.232 149.073,55.147 ; 122.911,52.375 122.911,56.845
  lines w4: 140.513,72.771 149.073,72.771 ; 140.792,101.016 147.208,101.016 148.986,99.238 148.986,98.102
Bottom Solder:
  rectangle: 93.116,48.971 97.536,53.416